# Altium PCB HCHO_Benchmark_B5.PcbDoc
Units mm, origin at the board's own origin, x right, y up, seen from the top; angles counter-clockwise.
Board outline 88 x 66 mm, 2 copper layers (Top Layer, Bottom Layer), stack 1.671 mm thick; 58 components, 50 nets, 182 pads, 50 vias.
Unrouted connection lines stored in the file: 6.
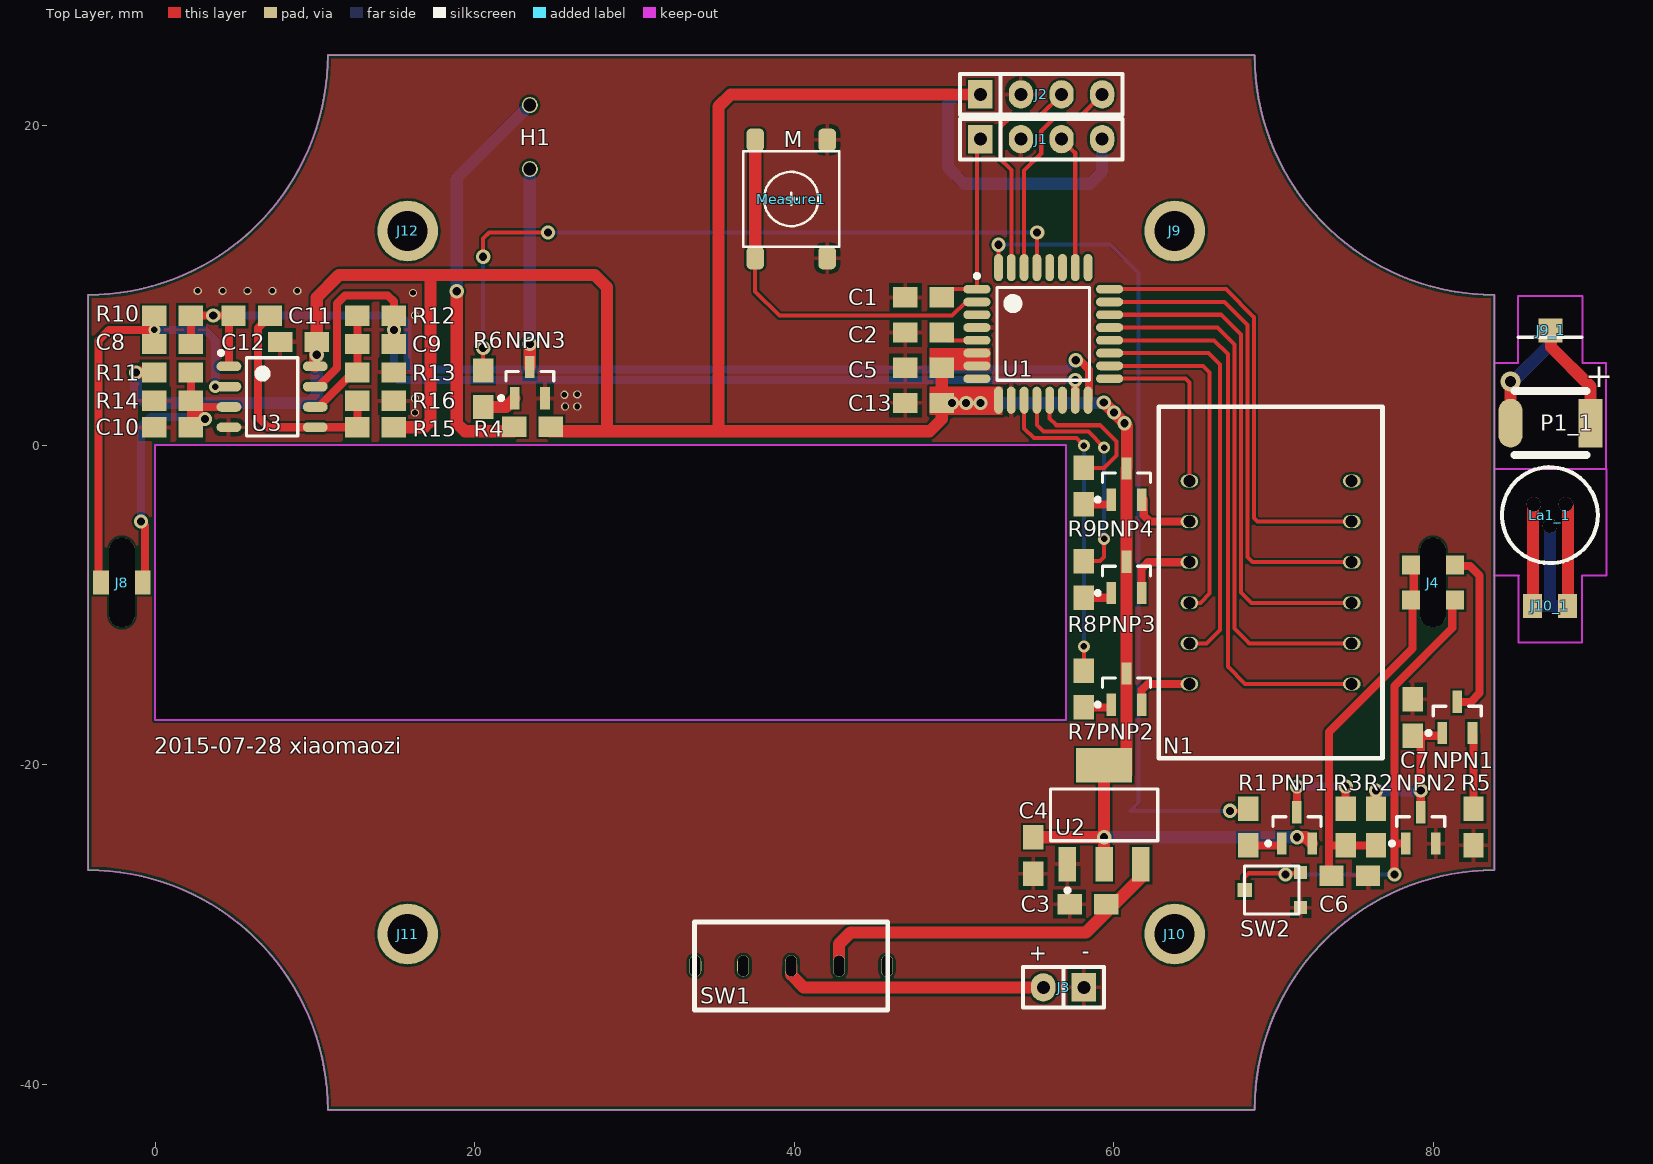
[diagram p0: Top Layer view]
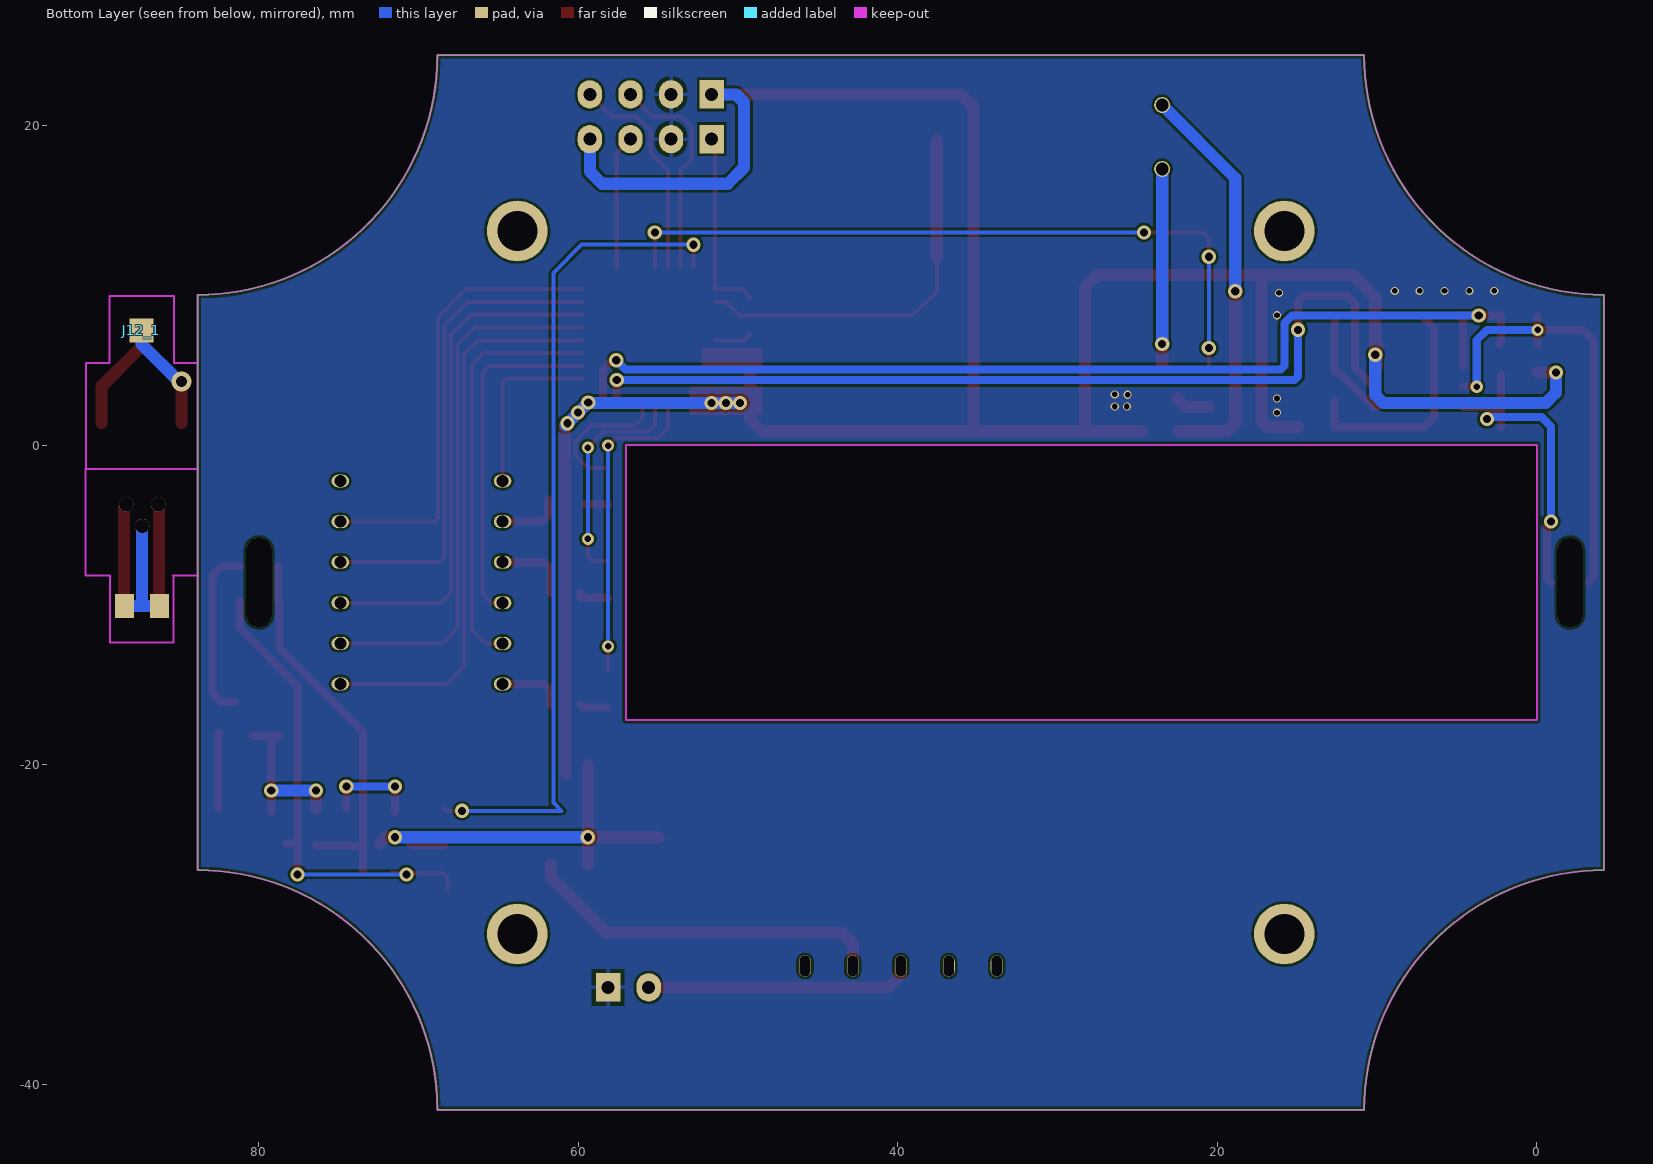
[diagram p1: Bottom Layer view, seen from below]

## Layer stack, top to bottom
Top Layer: signal copper 0.0356
Dielectric: core 1.6, FR-4, Dk 4.8
Bottom Layer: signal copper 0.0356

## Board outline
-4.2,-26.6 -4.2,9.4 ccw(c-4.2,24.4) 10.8,24.4 68.8,24.4 ccw(c83.8,24.4) 83.8,9.4 83.8,-26.6 ccw(c83.8,-41.6) 68.8,-41.6 10.8,-41.6 ccw(c-4.2,-41.6)
cut-out: 0,0 57,0 57,-17.2 0,-17.2

## Design rules (kind name [scope] priority, off if disabled: settings)
Clearance "6mil Special" [(HasFootprint('FPC 0.5mm 4P') OR HasFootprint('FPC 0.5mm 16P') OR HasFootprint('QFN40P500X500X90_HS-41L'))] p1: gap=0.152
Clearance "8mil all" [All] p2: gap=0.152
ComponentClearance [All] p1: gap=-100 collisioncheckmode=3 verticalgap=0.254 showdistances=FALSE
Height [All] p1: minheight=0 maxheight=50.8 prefheight=12.7
HoleSize [All] p1: absolutevalues=TRUE maxlimit=1817.048 minlimit=0 maxpercent=80.000 minpercent=20.000
HoleToHoleClearance [All] p1: gap=0.203 allowstackedmicrovias=TRUE
MinimumSolderMaskSliver [All] p1: minsoldermaskwidth=0
PolygonConnect PolygonConnect_1 [isvia] p1: connectstyle=Direct reliefconductorwidth=0.254 reliefentries=4 polygonreliefangle="90 Angle" airgapwidth=0.254
PolygonConnect [All] p2: connectstyle=Relief reliefconductorwidth=0.254 reliefentries=4 polygonreliefangle="90 Angle" airgapwidth=0.254
RoutingCorners [All] p1: cornerstyle=45-Degree minsetback=0.254 maxsetback=2.54
RoutingVias [All] p1: holewidth=0.356 width=0.508 viastyle="Through Hole" minholewidth=0.356 minwidth=0.508 maxholewidth=2.54 maxwidth=5.08
SilkToSilkClearance [All] p1: silktosilkclearance=0
SilkToSolderMaskClearance [IsPad] p1: minsilkscreentomaskgap=0 clearancetoexposedcopper=TRUE
SolderMaskExpansion [All] p1: expansion=0.102
Width 20mil_Power [(InNet('EP_SUPPLY&VBAT') OR InNet('PSUPPLY') OR InNet('P_3.3V') OR InNet('PSUPPLYBAT') OR InNet('P_3.3V') OR InNet('P_5V'))] p1: maxlimit=1000 minlimit=0.203 preferedwidth=0.508
Width 8mil_Basic [All] p2: maxlimit=100 minlimit=0.203 preferedwidth=0.254
20 further rules are at their usual default settings.

## Classes and differential pairs
component class HCHO_Benchmark: C1 C2 C3 C4 C5 C6 C7 C8 C9 C10 C11 C12 C13 H1 J1 J2 J3 J4 J8 J9 J10 J11 J12 Measure1 N1 NPN1 NPN2 NPN3 PNP1 PNP2 PNP3 PNP4 R1 R2 R3 R4 R5 R6 R7 R8 R9 R10 R11 R12 R13 R14 R15 R16 SW1 SW2 U1 U2 U3

## Components (designator, comment, footprint, x,y, rotation, side; value= is the part's Value field where it differs from the comment)
C1 "1uf" C0805 48.084,9.244 r0 top
C2 "1uf" C0805 48.084,7.043 r0 top
C3 "10uf" C0805 58.371,-28.729 r180 top
C4 "10uf" C0805 54.942,-25.681 r270 top
C5 "10uf" C0805 48.084,4.841 r180 top
C6 "1uf" C0805 74.754,-26.951 r0 top
C7 "1uf" C0805 78.691,-17.045 r90 top
C8 "6.8pf" C0805 1.094,6.323 r180 top
C9 "240pf" C0805 13.794,6.323 r180 top
C10 "10uf" C0805 1.094,1.116 r180 top
C11 "0.15uf" C0805 6.047,8.101 r180 top
C12 "10uf" C0805 8.968,6.45 r180 top
C13 "1uf" C0805 48.084,2.64 r0 top
H1 "HY09-5T" HY09-5T 23.446,19.277 r180 top
J1 "CON4" CON4 55.45,19.15 r0 top
J2 "CON4" CON4 55.45,21.944 r0 top
J3 "CON2" CON2 56.847,-33.936 r180 top
J4 "CON2x2_PCB" CON2x2_1.6mm_PCB 79.961,-8.6 r90 top
J8 "CON1X2_PCB" CON1x2_1.6mm_PCB -2.081,-8.6 r90 top
J9 "CON1" 2.5MM 63.8,13.4 r0 top
J9_1 "CON1_PCB" CON1_PCB 87.327,7.177 r0 top (schematic designator J9)
J10 "CON1" 2.5MM 63.8,-30.6 r0 top
J10_1 "CON4_PCB" CON4_PCB 87.285,-10.06 r0 top (schematic designator J10)
J11 "CON1" 2.5MM 15.8,-30.6 r0 top
J12 "CON1" 2.5MM 15.8,13.4 r0 top
J12_1 "CON1_PCB" CON1_PCB 87.327,7.177 r0 bottom (schematic designator J12)
La1_1 "Laser_Header" Laser_Header 87.278,-4.385 r180 top (schematic designator La1)
Measure1 "Patch_6x6x5" Patch6x6x5 39.8,15.4 r90 top
N1 "LG3631BH" LG3631BH 69.8,-8.6 r90 top
NPN1 "8050" SOT23-3 81.485,-17.045 r90 top
NPN2 "8050" SOT23-3 79.199,-23.96 r90 top
NPN3 "8050" SOT23-3 23.446,3.91 r90 top
P1_1 "photodetector" BPW34 87.319,1.375 r180 top (schematic designator P1)
PNP1 "8550" SOT23-3 71.452,-23.96 r90 top
PNP2 "8550" SOT23-3 60.784,-15.267 r90 top
PNP3 "8550" SOT23-3 60.784,-8.282 r90 top
PNP4 "8550" SOT23-3 60.784,-2.44 r90 top
R1 "1K" R0805 68.404,-23.903 r90 top
R2 "362" R0805 76.405,-23.903 r270 top
R3 "1K" R0805 74.5,-23.903 r270 top
R4 "0" R0805 23.622,1.143 r0 top
R5 "4R7" R0805 82.501,-23.903 r90 top
R6 "4.7K" R0805 20.525,3.529 r270 top
R7 "1K" R0805 58.117,-15.267 r90 top
R8 "1K" R0805 58.117,-8.409 r90 top
R9 "1K" R0805 58.117,-2.567 r90 top
R10 "3.7K" R0805 1.094,8.101 r0 top
R11 "4.7K" R0805 1.094,4.545 r180 top
R12 "220K" R0805 13.794,8.101 r0 top
R13 "3K" R0805 13.794,4.545 r180 top
R14 "1K" R0805 1.094,2.767 r0 top
R15 "2M" R0805 13.794,1.116 r0 top
R16 "510" R0805 13.794,2.767 r180 top
SW1 "SS12F44" SS12F44 39.8,-32.6 r180 top
SW2 "TMC2K2J" TMC2K2J 69.928,-27.84 r90 top
U1 "STM8S005K6T6C" STM8S005K6T6C 55.577,6.958 r0 top
U2 "1117-3.3" SOT223 59.387,-23.141 r0 top
U3 "LMV358" LMV358_SOP 7.317,3.021 r0 top

## Footprints (in the part's own frame and the unit in brackets; to place one, negate y for a bottom-side part, rotate by r counter-clockwise, add the part's x,y. Pads: shape width x height; smd on the part's side, far side on the other; paste and mask are expansions set on the pad)
2.5MM [mm]
  round 3.8 hole 2.5: 1(0,0)
BPW34 [mm]
  rect 1.5x3.048 smd: A(-2.5,0)
  oval 1.5x3.048 smd: C(2.5,0)
  silkscreen extent -2.25,-2 2.25,2
C0805 [mil]
  rect 60x50 smd: 1(-45,0) 2(45,0)
  body extent -52,-25 55,25, height 31
CON1_PCB [mm]
  rect 1.5x1.5 smd: 1(0,0)
CON1x2_1.6mm_PCB [mm]
  oval 5.6x1.6 hole 1.6 slot 5.6 at 0 deg unplated: 0(0,0)
  rect 1.5x1.2 smd: 1(0,1.2) 2(0,-1.2)
CON2 [mil]
  rect 60x70 hole 32: 1(-50,0)
  oval 60x70 hole 32: 2(50,0)
  silkscreen extent -100,-50 100,50, body extent -101,-50 100,50, height 295
CON2x2_1.6mm_PCB [mm]
  oval 5.6x1.6 hole 1.6 slot 5.6 at 0 deg unplated: 0(0,0)
  rect 1.2x1.5 smd: 1(-1.1,1.2) 2(-1.1,-1.2) 3(1.1,-1.2) 4(1.1,1.2)
CON4 [mil]
  rect 60x70 hole 32: 1(-150,0)
  oval 60x70 hole 32: 2(-50,0) 3(50,0) 4(150,0)
  silkscreen extent -200,-50 200,50, body extent -201,-50 199,50, height 295
CON4_PCB [mm]
  rect 1.2x1.5 smd far side: 1(-1.1,0) 4(1.1,0)
  rect 1.2x1.5 smd: 2(-1.1,0) 3(1.1,0)
HY09-5T [mm]
  round 1 hole 0.8: 1(0,-2) 2(0,2)
  body extent -4.46,-4.49 4.5,4.49, height 5.5
Laser_Header [mm]
  round 0.9 hole 0.9 unplated: 1(-1,-0.675) 2(1,-0.675) 3(0,0.675)
  silkscreen extent -3,-3 3,3, body extent -2.98,-2.99 3,2.99, height 16.7
LG3631BH [mm]
  oval 0.8x1.1 hole 0.75: 1(-6.35,-5.08) 2(-3.81,-5.08) 3(-1.27,-5.08) 4(1.27,-5.08) 5(3.81,-5.08) 6(6.35,-5.08) 7(6.35,5.08) 8(3.81,5.08) 9(1.27,5.08) 10(-1.27,5.08) 11(-3.81,5.08) 12(-6.35,5.08)
  silkscreen extent -11,-7 11,7, body extent -10.98,-6.99 10.99,7, height 7.3
LMV358_SOP [mm] "TSOP, 8-Leads, Body 3.00x3.00mm, Pitch 0.65mm, IPC Medium Density"
  oval 1.55x0.6 smd: 1(-2.7,1.905) 2(-2.7,0.635) 3(-2.7,-0.635) 4(-2.7,-1.905) 5(2.7,-1.905) 6(2.7,-0.635) 7(2.7,0.635) 8(2.7,1.905)
  silkscreen extent -3.32,-2.45 1.6,2.87, body extent -1.95,-2.47 1.93,2.46, height 1.1
Patch6x6x5 [mm]
  rrect50% 1.4x1.1 smd: 1(-3.7,2.25) 2(3.7,2.25) 3(3.7,-2.25) 4(-3.7,-2.25)
  silkscreen extent -3,-3 3,3, body extent -4.13,-3 4.13,3, height 5
R0805 [mil]
  rect 60x50 smd: 1(-45,0) 2(45,0)
  body extent -52,-25 55,25, height 31
SOT23-3 [mm]
  rect 1.4x0.6 smd: 1(-0.975,0.95) 2(-0.975,-0.95) 3(0.975,0)
  silkscreen extent -1.1,-1.5 0.7,1.92, body extent -0.7,-1.5 0.7,1.5, height 1
SOT223 [mm]
  rect 1.1x2.15 smd: 1(-2.3,-3.1) 2(0,-3.1) 3(2.3,-3.1)
  rect 3.5x2.15 smd: 4(0,3.1)
  silkscreen extent -3.35,-4.85 3.35,1.63, body extent -3.3,-3.2 3.3,3.1, height 1.7
SS12F44 [mm]
  oval 0.75x1.35 hole 0.65 slot 1.3 at 90 deg: 1(-6,0) 2(-3,0) 3(0,0) 4(3,0) 5(6,0)
  silkscreen extent -6.05,-2.75 6.05,2.75, body extent -6.05,-2.75 6.05,2.75, height 11
STM8S005K6T6C [mm]
  oval 1.7x0.55 smd: 1(-4.15,2.8) 2(-4.15,2) 3(-4.15,1.2) 4(-4.15,0.4) 5(-4.15,-0.4) 6(-4.15,-1.2) 7(-4.15,-2) 8(-4.15,-2.8) 17(4.15,-2.8) 18(4.15,-2) 19(4.15,-1.2) 20(4.15,-0.4) 21(4.15,0.4) 22(4.15,1.2) 23(4.15,2) 24(4.15,2.8)
  oval 0.55x1.7 smd: 9(-2.8,-4.15) 10(-2,-4.15) 11(-1.2,-4.15) 12(-0.4,-4.15) 13(0.4,-4.15) 14(1.2,-4.15) 15(2,-4.15) 16(2.8,-4.15) 25(2.8,4.15) 26(2,4.15) 27(1.2,4.15) 28(0.4,4.15) 29(-0.4,4.15) 30(-1.2,4.15) 31(-2,4.15) 32(-2.8,4.15)
  silkscreen extent -4.27,-2.9 2.9,3.75, body extent -3.5,-3.5 3.5,3.5, height 1.6
TMC2K2J [mm]
  rect 0.8x0.8 smd: 1(1.1,-1.75) 2(-1.1,-1.75)
  rect 0.9x0.9 smd: 3(0,1.75)
  silkscreen extent -1.5,-1.65 1.5,1.75, body extent -1.5,-1.65 1.49,1.75, height 0.9

## Part data
C1 C2 C3 C4 C5 C6 C7 C8 C9 C10 C11 C12 C13: library part C
NPN1 NPN2 NPN3: library part NPN
PNP1 PNP2 PNP3 PNP4: library part PNP
R1 R2 R3 R5 R7 R8 R9 R10 R11 R12 R13 R14 R15 R16: library part R
R4 R6: library part RES1
U2: library part 1117

## Via types
v1: diameter 0.889, hole 0.508, Top Layer to Bottom Layer, 30 vias
v2: diameter 0.508, hole 0.356, Top Layer to Bottom Layer, 13 vias
v3: diameter 0.762, hole 0.406, Top Layer to Bottom Layer, 6 vias
v4: diameter 1.27, hole 0.711, Top Layer to Bottom Layer, 1 vias

## Nets (pads, with @x,y where several pads share a name; then routed paths per layer and width w, separated by ;. In a path a pad name is that pad's centre, name@x,y a point inside that pad or via, vN(x,y) a via of type N, cw(c..) or ccw(c..) an arc to the next point about the centre after c; other vN are vias at no path point)
C_LASER: R1.2 U1.32 | length 52.2
  Top Layer w0.254: U1.32 v1(52.777,12.54) ; v1(67.261,-22.887) 68.277,-22.887 R1.2
  Bottom Layer w0.254: v1(52.777,12.54) 59.774,12.54 61.546,10.768 61.546,-22.379 61.038,-22.887 v1(67.261,-22.887)
GND: C1.1 C2.1 C3.2 C4.2 C5.2 C6.2 C7.2 C10.2 C12.2 C13.1 J1.2 J2.2 J3.1 Measure1.3 Measure1.4 NPN2.2 NPN3.2 R5.1 R13.1 R14.1 R16.1 SW2.2 U1.4 U1.10 U2.1 U3.4
  other v2: 16.256,2.032 25.654,2.413 26.416,2.413 16.256,2.921 25.605,3.148 26.416,3.175 16.256,8.128 16.129,9.525 2.667,9.652 4.223,9.652 5.779,9.652 7.334,9.652 8.89,9.652
LASER_P: C6.1 J4.1 J4.4 R2.2 R3.2 | length 24.3
  Top Layer w0.508: C6.1@73.458,-26.697 73.458,-25.046 ; R2.2 R3.2 73.458,-25.046 ; J4.1@78.754,-9.763 78.691,-9.827 78.691,-12.727 73.458,-17.96 73.458,-25.046 ; J4.1@78.761,-9.763 J4.4@78.761,-7.563
N_A: N1.11 U1.19 | length 26.1
  Top Layer w0.254: U1.19 65.921,5.758 66.626,5.053 66.626,-11.584 65.8,-12.41 N1.11
N_B: N1.7 U1.17 | length 11.3
  Top Layer w0.254: U1.17 64.473,4.158 64.72,3.91 N1.7
N_C: N1.4 U1.23 | length 30.4
  Top Layer w0.254: U1.23 66.912,8.958 68.353,7.517 68.353,-7.012 68.671,-7.33 N1.4
N_COM1: R7.2 U1.11 | length 20
  Top Layer w0.254: U1.11 54.377,1.046 54.992,0.43 57.659,0.43 v3(58.117,-0.027) ; R7.2 v3(58.117,-12.6)
  Bottom Layer w0.254: v3(58.117,-12.6) v3(58.117,-0.027)
N_COM2: R8.2 U1.12 | length 14.6
  Top Layer w0.254: U1.12 55.177,1.262 55.602,0.836 58.396,0.836 v3(59.387,-0.154) ; R8.2 59.133,-7.266 59.387,-7.012 v3(59.387,-5.869)
  Bottom Layer w0.254: v3(59.387,-5.869) v3(59.387,-0.154)
N_COM3: R9.2 U1.13 | length 9.2
  Top Layer w0.254: U1.13 55.977,1.656 56.389,1.243 59.133,1.243 60.149,0.227 60.149,-0.662 59.387,-1.424 R9.2
N_D: N1.2 U1.21 | length 33.8
  Top Layer w0.254: U1.21 66.48,7.358 67.54,6.297 67.54,-11.483 68.467,-12.41 N1.2
N_DP: N1.3 U1.22 | length 32.1
  Top Layer w0.254: U1.22 66.696,8.158 67.946,6.907 67.946,-9.222 68.594,-9.87 N1.3
N_E: N1.1 U1.20 | length 35.5
  Top Layer w0.254: U1.20 66.264,6.558 67.134,5.688 67.134,-13.87 68.213,-14.95 N1.1
N_F: N1.10 U1.18 | length 21.8
  Top Layer w0.254: U1.18 65.578,4.958 65.991,4.545 65.991,-9.298 65.419,-9.87 N1.10
N_G: N1.5 U1.24 | length 28.5
  Top Layer w0.254: U1.24 67.001,9.758 68.759,7.999 68.759,-4.574 68.975,-4.79 N1.5
NBEEP: R6.1 U1.29 | length 45.3
  Top Layer w0.254: R6.1 v1(20.525,6.069) ; v1(20.525,11.784) 20.525,12.927 20.906,13.308 v1(24.589,13.308) ; U1.29 55.177,13.289 v1(55.196,13.308)
  Bottom Layer w0.254: v1(20.525,6.069) v1(20.525,11.784) ; v1(24.589,13.308) v1(55.196,13.308)
NetC2_2: C2.2 U1.5 | length 2.4
  Top Layer w0.254: C2.2@49.227,6.958 49.627,6.558 U1.5
NetC3_1: C3.1 SW1.2 U2.3 | length 22.8
  Top Layer w0.762: SW1.2 42.8,-31.219 43.512,-30.507 58.244,-30.507 61.687,-27.064 U2.3
NetC7_1: C7.1 NPN1.1 NPN2.3 R2.1 | length 10.9
  Top Layer w0.508: NPN2.3 v1(79.199,-21.617) 79.199,-18.188 C7.1 NPN1.1@80.367,-18.188
  Top Layer w0.762: R2.1 v1(76.405,-21.617)
  Bottom Layer w0.762: v1(76.405,-21.617) v1(79.199,-21.617)
NetC8_2: C8.2 J8.1 R10.1 U3.2 | length 29.5
  Top Layer w0.508: J8.1@-3.281,-8.536 -3.556,-8.262 -3.556,6.556 -2.9,7.212 v3(-0.049,7.212) ; R10.1 v3(-0.049,7.212) ; v3(3.761,3.656) U3.2 ; v3(-0.049,7.212) C8.2 v3(-0.049,7.212)
  Bottom Layer w0.508: v3(-0.049,7.212) 3.126,7.212 3.761,6.577 v3(3.761,3.656)
NetC9_2: C9.2 R12.1 R13.2 U3.6 | length 7.1
  Top Layer w0.508: U3.6 10.221,2.386 12.38,4.545 R13.2 C9.2 R12.1
NetC10_1: C10.1 J8.2 R11.1 R14.2 U3.3 | length 21.1
  Top Layer w0.508: v1(-0.881,-4.783) -0.635,-5.03 -0.635,-8.36 J8.2@-0.875,-8.6 ; C10.1 2.237,2.005 ; R11.1@2.237,4.418 R14.2 R14.2@2.237,2.386 ; v1(3.126,1.624) 2.745,2.005 2.237,2.005 ; U3.3 R14.2@2.237,2.386 ; 2.237,2.005 R14.2@2.237,2.386
  Bottom Layer w0.508: v1(-0.881,-4.783) -0.881,1.173 -0.303,1.751 3.126,1.751 v1(3.126,1.624)
NetC11_1: C11.1 R15.1 R16.2 U3.5 | length 14.8
  Top Layer w0.508: C11.1 6.428,7.339 6.428,1.751 7.063,1.116 U3.5 R15.1 R16.2
NetH1_1: H1.1 R4.1 | length 25.6
  Top Layer w0.762: v1(18.874,9.625) 18.874,1.37 19.382,0.862 20.652,0.862 R4.1@22.43,0.862
  Bottom Layer w0.762: v1(18.874,9.625) 18.874,16.705 H1.1
NetH1_2: H1.2 NPN3.3 | length 12.4
  Top Layer w0.762: NPN3.3 v1(23.446,6.323)
  Bottom Layer w0.762: v1(23.446,6.323) H1.2
NetJ3_2: J3.2 SW1.3 | length 16.6
  Top Layer w0.762: SW1.3 39.8,-33.145 40.591,-33.936 J3.2
NetJ4_2: J4.2 NPN2.1 SW2.1 SW2.3 | length 31.5
  Top Layer w0.254: SW2.3 68.178,-27.05 68.432,-26.796 71.622,-26.796 SW2.1 v1(70.733,-26.867)
  Top Layer w0.508: v1(77.548,-26.867) 77.548,-24.935 ; NPN2.1 77.548,-24.935 ; J4.2@81.167,-9.763 81.167,-11.454 77.548,-15.073 77.548,-24.935
  Bottom Layer w0.254: v1(70.733,-26.867) v1(77.548,-26.867)
NetJ4_3: J4.3 NPN1.3 | length 11
  Top Layer w0.508: J4.3@81.161,-7.563 82.29,-7.563 82.882,-8.155 82.882,-15.521 82.333,-16.07 NPN1.3
NetJ5_1: 
NetJ5_2: 
NetJ5_3: 
NetJ6_1: 
NetJ7_1: 
NetN1_8: N1.8 PNP4.2 | length 4
  Top Layer w0.508: PNP4.2@61.861,-3.415 61.861,-4.406 62.244,-4.79 N1.8
NetN1_9: N1.9 PNP3.2 | length 4.7
  Top Layer w0.508: PNP3.2 61.734,-7.713 62.117,-7.33 N1.9
NetN1_12: N1.12 PNP2.2 | length 4.1
  Top Layer w0.508: PNP2.2 61.734,-15.333 62.117,-14.95 N1.12
NetNPN1_2: NPN1.2 R5.2 | length 4.8
  Top Layer w0.508: NPN1.2 82.501,-18.086 R5.2
NetNPN3_1: NPN3.1 R6.2 | length 2.2
  Top Layer w0.762: R6.2 21.947,2.386 NPN3.1
NetPNP1_1: PNP1.1 R1.1 | length 2.1
  Top Layer w0.508: R1.1 70.39,-25.046 PNP1.1
NetPNP1_3: PNP1.3 R3.1 | length 6.1
  Top Layer w0.508: PNP1.3 v1(71.452,-21.363) ; R3.1 v1(74.5,-21.363)
  Bottom Layer w0.508: v1(71.452,-21.363) v1(74.5,-21.363)
NetPNP2_1: PNP2.1 R7.1 | length 1.8
  Top Layer w0.508: R7.1 59.666,-16.41 PNP2.1
NetPNP3_1: PNP3.1 R8.1 | length 2
  Top Layer w0.508: R8.1 59.834,-9.552 PNP3.1
NetPNP4_1: PNP4.1 R9.1 | length 1.4
  Top Layer w0.508: R9.1 PNP4.1@59.539,-3.71
NRESET: C1.2 J1.1 U1.1 | length 12.1
  Top Layer w0.254: C1.2 49.741,9.758 U1.1 J1.1@51.427,18.937 ; J1.1@51.3,18.81 J1.1@51.427,18.937 ; J1.1 J1.1@51.427,18.937
NSWIM: J1.3 U1.26 | length 8.4
  Top Layer w0.254: J1.3 57.577,18.293 U1.26
OUT1: C8.1 C11.2 R10.2 U1.16 U3.1 | length 68
  Top Layer w0.508: C8.1@2.364,6.323 2.237,6.45 R10.2 v1(3.634,8.101) C11.2 4.617,7.814 U3.1 ; v1(57.609,5.307) 57.863,5.307 58.428,4.742 58.428,2.859 U1.16
  Bottom Layer w0.508: v1(3.634,8.101) 15.318,8.101 15.788,7.631 15.788,4.964 16.022,4.729 57.031,4.729 v1(57.609,5.307)
OUT2: C9.1 R12.2 U1.15 U3.7 | length 59.4
  Top Layer w0.508: U3.7 10.221,3.656 11.381,4.816 11.381,8.863 11.889,9.371 14.556,9.371 14.937,8.99 R12.2 v1(14.937,7.212) C9.1 ; U1.15 v1(57.577,4.069)
  Bottom Layer w0.508: v1(14.937,7.212) 14.937,4.291 15.159,4.069 v1(57.577,4.069)
P_3.3V: C4.1 C5.1 C12.1 C13.2 J1.4 J2.1 PNP1.2 PNP2.3 PNP3.3 PNP4.3 R4.2 R11.2 R15.2 U1.6 U1.7 U1.9 U2.2 U2.4 U3.8 | length 205.4
  Top Layer w0.254: C13.2@49.227,2.259 C13.2@49.608,2.64 ; C5.1@49.227,4.672 C5.1@49.481,4.672 ; U1.9@52.609,2.64 U1.9
  Top Layer w0.762: v1(-1.192,4.545) R11.2 ; U3.8 10.017,6.356 C12.1 ; v1(10.111,5.655) C12.1 ; R15.2 16.842,1.116 17.223,1.497 17.223,10.641 ; R4.2@24.716,0.862 35.257,0.862 ; 28.272,0.862 28.272,6.958 28.272,9.879 27.51,10.641 17.223,10.641 ; C5.1@49.227,4.672 49.227,2.259 49.227,1.624 48.465,0.862 35.257,0.862 ; J2.1 36.019,21.944 35.257,21.182 35.257,0.862 ; C4.1 v1(59.387,-24.538) ; v1(59.361,2.665) v1(59.996,2.03) 60.809,1.217 60.809,-1.44 PNP4.3 PNP3.3 PNP2.3 U2.4@60.784,-20.601 ; U2.2 v1(59.387,-24.538) ; U2.4 v1(59.387,-24.538) ; v1(71.452,-24.538) 72.005,-24.538 PNP1.2 ; C12.1 10.111,9.244 11.508,10.641 17.223,10.641
  Bottom Layer w0.762: v1(-1.192,4.545) -1.192,3.275 -0.557,2.64 9.603,2.64 10.111,3.148 v1(10.111,5.655) ; v1(49.862,2.64) v1(50.751,2.64) v1(51.64,2.64) 59.387,2.64 v1(59.996,2.03) v1@60.784,1.243 ; J2.1 50.116,21.944 49.608,21.436 49.608,17.372 50.624,16.356 58.498,16.356 59.26,17.118 J1.4 ; v1(59.387,-24.538) v1(71.452,-24.538)
  other v1: 60.657,1.37
TRRIGLE: Measure1.1 Measure1.2 U1.2 | length 24.3
  Top Layer w0.254: Measure1.1 37.55,9.618 39.067,8.101 49.876,8.101 50.733,8.958 U1.2
  Top Layer w0.762: Measure1.1 Measure1.2
U_RXD: J2.3 U1.31 | length 13.7
  Top Layer w0.254: U1.31 53.577,17.213 53.45,17.34 52.91,17.88 52.91,19.912 53.545,20.547 55.323,20.547 J2.3
U_TXD: J2.4 U1.30 | length 13.8
  Top Layer w0.254: U1.30 54.377,17.188 55.45,18.261 55.45,19.658 56.339,20.547 57.863,20.547 J2.4
pads on no net: J4.0 J8.0 J9.1 J9_1.1 J10.1 J10_1.1 J10_1.2 J10_1.3 J10_1.4 J11.1 J12.1 J12_1.1 La1_1.1 La1_1.2 La1_1.3 N1.6 P1_1.A P1_1.C SW1.1 SW1.4 SW1.5 U1.3 U1.8 U1.14 U1.25 U1.27 U1.28
copper on no net: | length 32.9
  Top Layer w0.762: 84.819,1.375 v4(84.819,3.977) ; 86.185,-10.06 86.216,-10.029 86.216,-3.772 86.278,-3.71 ; 87.327,7.177 87.358,7.146 87.358,6.13 89.819,3.668 89.819,1.375 ; 88.278,-3.71 88.416,-3.848 88.416,-10.029 88.385,-10.06
  Bottom Layer w0.762: v4(84.819,3.977) v4@84.971,3.977 ; v4@84.991,3.977 v4@84.971,3.977 ; 86.185,-10.06 88.385,-10.06 ; 87.278,-10.053 87.278,-5.06 ; 87.327,6.333 v4@84.971,3.977

## Polygon pours and split planes (outlines as drawn)
GND on Bottom Layer "Bottom Layer-No Net" (solid, remove dead copper, pour order 4): -9.906,30.48 92.835,30.48 92.835,-47.371 -10.035,-47.371
GND on Top Layer "Bottom Layer-No Net" (solid, remove dead copper, pour order 3): -9.906,34.036 92.835,34.036 92.835,-43.815 -10.035,-43.815

## Keep-outs
Keep-Out Layer:
  lines w0.003: 83.763,-8.155 83.795,-8.155 83.795,-1.536 83.795,-1.505
  lines w0.01: 83.795,-1.505 83.795,5.145
  lines w0.127: 83.795,-8.155 85.357,-8.155 ; 83.795,5.145 85.295,5.145 85.295,9.336 89.326,9.336 89.326,5.145 90.795,5.145 90.795,-1.505 83.795,-1.505 90.826,-1.505 90.826,-8.155 89.295,-8.155 89.295,-12.346 85.326,-12.346 85.326,-8.155 ; -4.2,-26.6 cw(c-4.2,-41.6) 10.8,-41.6 68.8,-41.6 cw(c83.8,-41.6) 83.8,-26.6 83.8,9.4 cw(c83.8,24.4) 68.8,24.4 10.8,24.4 cw(c-4.2,24.4) -4.2,9.4 -4.2,-26.6 ; 0,-17.2 0,0 57,0 57,-17.2 0,-17.2

## Other copper
Top Layer:
  rectangle net P_3.3V: 48.465,4.672 52.275,6.069
  rectangle net P_3.3V: 48.465,1.878 53.037,3.656
Multi-Layer:
  pour cut-out: 0,0 57,0 57,-17.2 0,-17.2

## Silkscreen, mask and mechanical layers (free items; w line width, h text height)
Top Overlay:
  lines w0.2: 85.295,6.745 89.295,6.745
  text "M" at 39.321,18.642 h1.02
  text "+" at 89.486,3.621 h1.52
  text "2015-07-28 xiaomaozi" at -0.049,-19.331 h1.02
  text "+" at 55.831,-31.396 h1.02 r180
  text "-" at 58.498,-31.396 h1.02 r180
Mechanical 1:
  circle w0.127: c15.8,-30.6 r1.25
  circle w0.127: c63.8,-30.6 r1.25
  circle w0.127: c15.8,13.4 r1.25
  circle w0.127: c63.8,13.4 r1.25
  circle w0.127: c39.8,15.4 r0.254
  circle w0.127: c69.8,-8.6 r1.271
  lines w0.127: -3,-10.6 -1.4,-10.6 -1.4,-6.6 -3,-6.6 -3,-10.6
Mechanical 8:
  lines w0.127: 12.05,-30.6 13.3,-30.6 15.8,-30.6 ; 12.05,13.4 13.3,13.4 15.8,13.4 ; 15.8,-34.35 15.8,-33.1 15.8,-30.6 ; 15.8,-26.85 15.8,-28.1 15.8,-30.6 ; 15.8,9.65 15.8,10.9 15.8,13.4 ; 15.8,17.15 15.8,15.9 15.8,13.4 ; 19.55,-30.6 18.3,-30.6 15.8,-30.6 ; 19.55,13.4 18.3,13.4 15.8,13.4 ; 35.535,-32.6 37.3,-32.6 39.8,-32.6 ; 37.3,15.4 39.8,15.4 ; 39.8,-30.1 39.8,-28.335 ; 39.8,12.9 39.8,15.4 ; 39.8,17.9 39.8,15.4 ; 42.3,15.4 39.8,15.4 ; 60.177,9.717 61.427,9.717 ; 63.8,-34.35 63.8,-33.1 63.8,-30.6 66.3,-30.6 67.55,-30.6 ; 66.029,-8.6 67.3,-8.6 69.8,-8.6 ; 69.8,-12.371 69.8,-11.1 69.8,-8.6 ; 69.8,-4.829 69.8,-6.1 69.8,-8.6 ; 73.571,-8.6 72.3,-8.6 69.8,-8.6

## Text inside footprints (layer, text, board x,y; h text height)
U3: Mechanical 15 "1" at 7.767,2.857 h0.75 r90